# Altium PCB board.PcbDoc
Units mil, origin at the board's own origin, x right, y up, seen from the top; angles counter-clockwise.
Board outline 1692.91 x 787.4 mil, 2 copper layers (Top Layer, Bottom Layer); 68 components, 72 nets, 311 pads, 4 vias.
Unrouted connection lines stored in the file: 219.
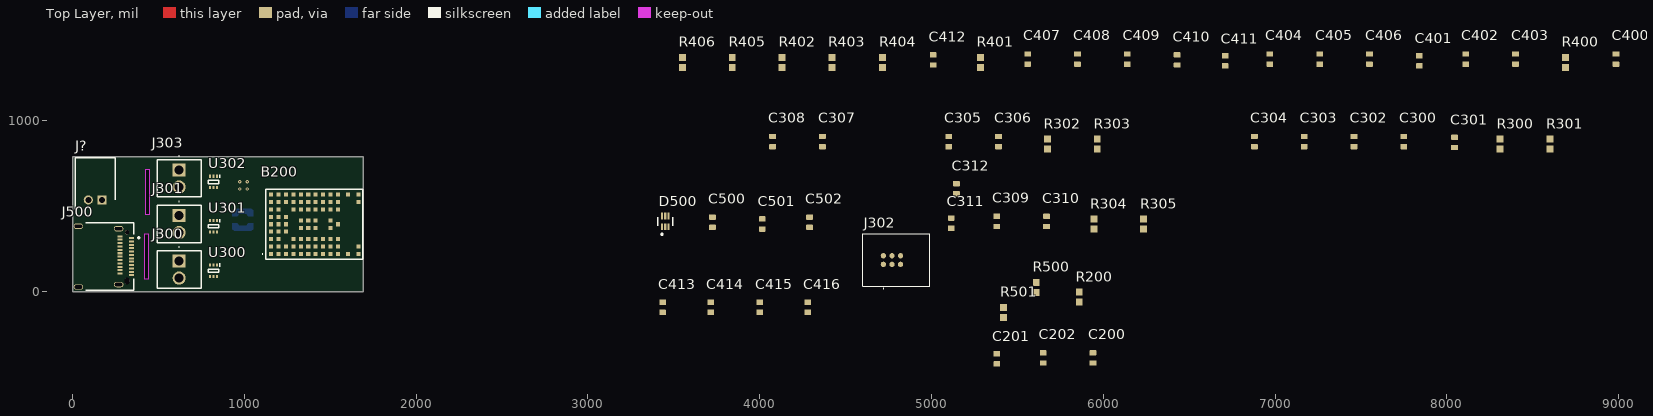
[diagram p0: Top Layer view]
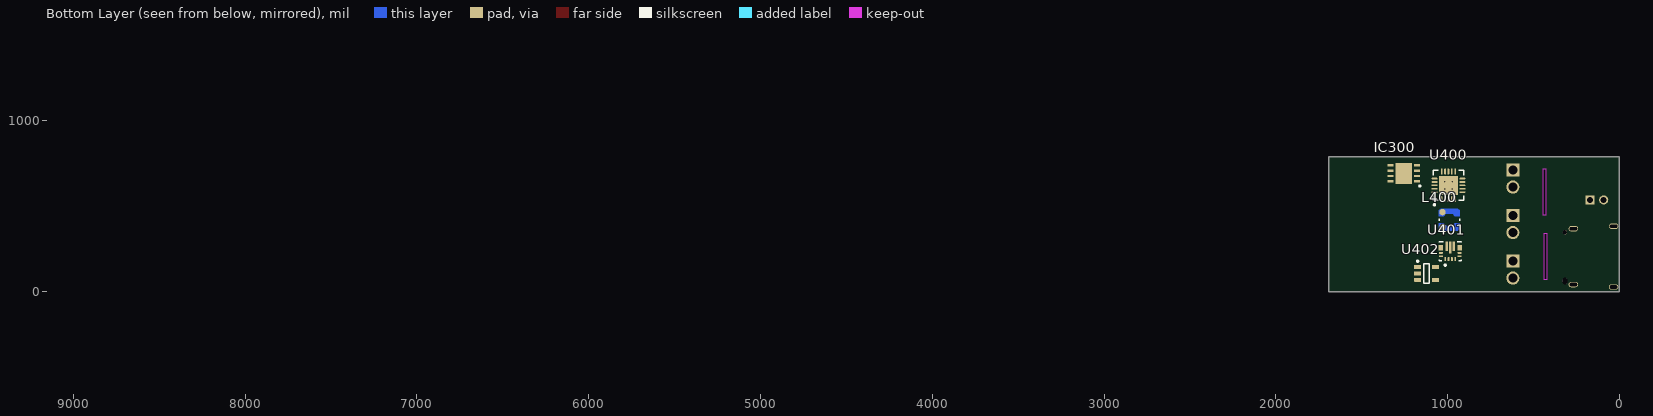
[diagram p1: Bottom Layer view, seen from below]

## Layer stack, top to bottom
Top Solder: solder mask 0.4, Solder Resist, Dk 3.5
Top Layer: signal copper 1.4
Dielectric 1: dielectric 12.6, FR-4, Dk 4.8
Bottom Layer: signal copper 1.4
Bottom Solder: solder mask 0.4, Solder Resist, Dk 3.5

## Board outline
0,0 0,787.4 1692.91,787.4 1692.91,0
cut-out: 420,337.5 440,337.5 440,72.5 420,72.5
cut-out: 425,715 445,715 445,450 425,450

## Design rules (kind name [scope] priority, off if disabled: settings)
Clearance [All] p1: gap=10 ignorepadtopadclearanceinfootprint=FALSE
DiffPairsRouting [All] p1: maxlimit=10 minlimit=10 mostfreqgap=10 toplayer_minwidth=15 toplayer_maxwidth=15 toplayer_prefwidth=15 bottomlayer_minwidth=15 bottomlayer_maxwidth=15 bottomlayer_prefwidth=15 maxuncoupledlength=500
PolygonConnect [All] p1: connectstyle=Relief reliefconductorwidth=10 reliefentries=4 polygonreliefangle="90 Angle" airgapwidth=10
RoutingVias [All] p1: holewidth=28 width=50 viastyle="Through Hole" minholewidth=28 minwidth=50 maxholewidth=28 maxwidth=50
SolderMaskExpansion [All] p1: expansion=4 istentingtop=FALSE
SupplyNets "Schematic Supply Nets_4" [InNet('V-BAT')] p1: voltage=0.000
SupplyNets "Schematic Supply Nets_3" [InNet('MCU_VBUS')] p2: voltage=0.000
SupplyNets "Schematic Supply Nets_2" [InNet('MCU_VDD')] p3: voltage=0.000
SupplyNets "Schematic Supply Nets_1" [InNet('MCU_GND')] p4: voltage=0.000
SupplyNets "Schematic Supply Nets" [InNet('5V0')] p5: voltage=0.000
Width [All] p1: maxlimit=10 minlimit=10 preferedwidth=10
29 further rules are at their usual default settings.

## Classes and differential pairs
component class U_USB: C500 C501 C502 D500 J500 R500 R501
component class U_Power: C400 C401 C402 C403 C404 C405 C406 C407 C408 C409 C410 C411 C412 C413 C414 C415 C416 J? L400 R400 R401 R402 R403 R404 R405 R406 U400 U401 U402
component class U_Peripherals: C300 C301 C302 C303 C304 C305 C306 C307 C308 C309 C310 C311 C312 IC300 J300 J301 J302 J303 R300 R301 R302 R303 R304 R305 U300 U301 U302
component class U_MCU_nRF5340: B200 C200 C201 C202 R200
differential pair USB_D: +USB_D_P -USB_D_N

## Components (designator, comment, footprint, x,y, rotation, side; value= is the part's Value field where it differs from the comment)
B200 "NORA-B126-00B" NORAB12600B 1407.13,393.35 r0 top
C200 "10uF" CAP_0603 5940,-385 r90 top
C201 "100nF" CAP_0603 5380,-390 r90 top
C202 "10uF" CAP_0603 5650,-385 r90 top
C300 "10uF" CAP_0603 7750,875 r90 top value=10µF
C301 "100nF" CAP_0603 8045,870 r90 top
C302 "100nF" CAP_0603 7460,875 r90 top
C303 "150pf" CAP_0603 7170,875 r90 top value=10µF
C304 "150pf" CAP_0603 6880,875 r90 top value=10µF
C305 "10uF" CAP_0603 5100,875 r90 top value=10µF
C306 "100nF" CAP_0603 5390,875 r90 top
C307 "150pf" CAP_0603 4365,875 r90 top value=10µF
C308 "150pf" CAP_0603 4075,875 r90 top value=10µF
C309 "10uF" CAP_0603 5380,410 r90 top value=10µF
C310 "100nF" CAP_0603 5670,410 r90 top
C311 "150pf" CAP_0603 5115,400 r90 top value=10µF
C312 "150pf" CAP_0603 5145,600.47 r90 top value=10µF
C400 "100nF" CAP_0603 8985,1355 r90 top
C401 "10uF" CAP_0603 7840,1345 r90 top value=10µF
C402 "100nF" CAP_0603 8110,1355 r90 top
C403 "22uF" CAP_0603 8400,1355 r90 top value=22µF
C404 "10uF" CAP_0603 6970,1355 r90 top value=10µF
C405 "100nF" CAP_0603 7260,1355 r90 top
C406 "22uF" CAP_0603 7550,1355 r90 top value=22µF
C407 "10uF" CAP_0603 5560,1355 r90 top value=10µF
C408 "10uF" CAP_0603 5850,1355 r90 top value=10µF
C409 "100nF" CAP_0603 6140,1355 r90 top
C410 "22uF" CAP_0603 6430,1350 r90 top value=22µF
C411 "22uF" CAP_0603 6710,1345 r90 top value=22µF
C412 "10uF" CAP_0603 5010,1350 r90 top value=10µF
C413 "100nF" CAP_0603 3435,-90 r90 top
C414 "22uF" CAP_0603 3715,-90 r90 top value=22µF
C415 "100nF" CAP_0603 4000,-90 r90 top
C416 "22uF" CAP_0603 4280,-90 r90 top value=22µF
C500 "10uF" CAP_0603 3725,405 r90 top
C501 "100nF" CAP_0603 4015,395 r90 top
C502 "100nF" CAP_0603 4290,405 r90 top
D500 "DSILC6-4P6" FP-SOT-666-MFG 3450,410 r90 top value=1.5pF
IC300 "MX25R6435FZAIL0-TR" SON80P400X400X60-9N 1255,690 r0 bottom
J300 "691210910002" 691210910002 620,180 r270 top
J301 "691210910002" 691210910002 620,445 r270 top
J302 "TC2030-IDC-NL" TC2030IDC 4757.52,185 r0 top
J303 "691210910002" 691210910002 620,710 r270 top
J500 "12401832E402A" FP-12401832E402A-MFG 145,205 r270 top
J? "S2B-PH-K-S_LF__SN_" SHDRRA2W50P0X200_1X2_590X760X480P 170,535 r0 top
L400 "LPS3015-223MRC" FP-LPS3015-MFG 990,420 r90 bottom
R200 "10K" RESC1607X60N 5860,-30 r90 top
R300 "41.7K" RESC1607X60N 8310,860 r90 top
R301 "41.7K" RESC1607X60N 8600,860 r90 top
R302 "41.7K" RESC1607X60N 5675,860 r90 top
R303 "41.7K" RESC1607X60N 5965,860 r90 top
R304 "41.7K" RESC1607X60N 5945,395 r90 top
R305 "41.7K" RESC1607X60N 6235,395 r90 top
R400 "220K" RESC1607X60N 8690,1335 r90 top
R401 "41.7K" RESC1607X60N 5285,1335 r90 top
R402 "10K" RESC1607X60N 4130,1335 r90 top
R403 "10K" RESC1607X60N 4420,1335 r90 top
R404 "10K" RESC1607X60N 4715,1335 r90 top
R405 "10K" RESC1607X60N 3840,1335 r90 top
R406 "100K" RESC1607X60N 3550,1335 r90 top
R500 "5.1K" RESC1607X60N 5610,26.06 r90 top
R501 "5.1K" RESC1607X60N 5420,-120 r90 top
U300 "DRV8212DRLR" SOTFL50P160X60-6N 820,122.99 r270 top
U301 "DRV8212DRLR" SOTFL50P160X60-6N 820,381.5 r270 top
U302 "DRV8212DRLR" SOTFL50P160X60-6N 820,640 r270 top
U400 "MCP73871-1CAI/ML" QFN-ML20_M 995,620 r90 bottom
U401 "TPS63070RNMR" FP-RNM0015A-MFG 984.53,235.28 r90 bottom
U402 "TLV78533PDBVR" SOT-23-5 1122.17,107.4 r180 bottom

## Footprints (in the part's own frame and the unit in brackets; to place one, negate y for a bottom-side part, rotate by r counter-clockwise, add the part's x,y. Pads: shape width x height; smd on the part's side, far side on the other; paste and mask are expansions set on the pad)
691210910002 [mm]
  rect 1.95x1.95 hole 1.3: 1(0,0)
  round 1.95 hole 1.3: 2(2.54,0)
  silkscreen extent -2.1,-3.25 4.01,3.25, body extent -1.47,-3.38 4.01,3.12, height 8.51
CAP_0603 [mm]
  rrect25% 0.8x1 smd: 1(-0.75,0) 2(0.75,0)
  body extent -0.8,-0.4 0.8,0.4, height 0.51
FP-12401832E402A-MFG [mm]
  rrect100% 0.8x1.4 hole 1.1 slot 0.5 at 0 deg paste-2539.97 mask+0: 1(-4.13,3.115) 2(4.13,3.115) 3(-4.49,-2.835) 4(4.49,-2.835)
  rect 0.3x0.7 smd paste+0 mask+0: A1(-2.75,5.025) A2(-2.25,5.025) A3(-1.75,5.025) A4(-1.25,5.025) A5(-0.75,5.025) A6(-0.25,5.025) A7(0.25,5.025) A8(0.75,5.025) A9(1.25,5.025) A10(1.75,5.025) A11(2.25,5.025) A12(2.75,5.025) B1(2.5,3.325) B2(2,3.325) B3(1.5,3.325) B4(1,3.325) B5(0.5,3.325) B6(0,3.325) B7(-0.5,3.325) B8(-1,3.325) B9(-1.5,3.325) B10(-2,3.325) B11(-2.5,3.325) B12(-3,3.325)
  round 0.65 hole 0.65 unplated paste-2539.97 mask+0: ""(-3.6,4.365)
  rrect100% 0.95x0.65 hole 0.65 slot 0.95 at 0 deg unplated paste-2539.97 mask+0: ""(3.6,4.365)
  silkscreen extent -5.01,-1.76 4.99,6.22, body extent -4.99,-5.45 4.99,5.48, height 0.25
FP-LPS3015-MFG [mil]
  round 36.89 smd paste+0 mask+0: 1(-43.92,39.54) 2(43.92,39.54)
  Top Layer region: 20.08,-60.04 54.92,-60.04 64.96,-50 64.96,50 54.92,60.04 20.08,60.04 20.08,32.48 35.04,20.08 35.04,-20.08 20.08,-32.48 20.08,-60.04
  Top Layer region: -20.08,-60.04 -54.92,-60.04 -64.96,-50 -64.96,50 -54.92,60.04 -20.08,60.04 -20.08,32.48 -35.04,20.08 -35.04,-20.08 -20.08,-32.48 -20.08,-60.04
  silkscreen extent -5,-60 5,60, body extent -58,-58 58,58, height 59
FP-RNM0015A-MFG [mm]
  rrect40% 0.6x0.25 smd paste+0 mask-1000: 1(-1.15,0.75) 2(-1.15,0.25) 3(-1.15,-0.25) 4(-1.15,-0.75)
  rrect40% 0.25x0.6 smd paste+0 mask-1000: 5(-0.725,-1.4) 6(-0.225,-1.4) 14(-0.225,1.4) 15(-0.725,1.4)
  rrect29% 0.85x0.7 smd paste-1000 mask-1000: 7-8(0.525,-1.4) 12-13(0.525,1.4)
  rrect57% 1.45x0.35 smd paste-1000 mask-1000: 9(0.775,-0.5) 11(0.775,0.5)
  rrect57% 1.8x0.35 smd paste-1000 mask-1000: 10(0.6,0)
  silkscreen extent -2.15,-1.65 1.4,1.65, body extent -1.25,-1.5 1.25,1.5, height 1
FP-SOT-666-MFG [mm]
  rect 0.99x0.3 smd paste+0 mask+0: 1(-0.805,0.5) 2(-0.805,0) 3(-0.805,-0.5) 4(0.805,-0.5) 5(0.805,0) 6(0.805,0.5)
  silkscreen extent -2.02,-1.1 0.65,1.1, body extent -1.4,-0.95 1.4,0.95, height 0.25
NORAB12600B [mm]
  rect 0.6x0.6 smd: A1(-6.4,-4.4) A2(-6.4,-3.3) A3(-6.4,-2.2) A4(-6.4,-1.1) A5(-6.4,0) A6(-6.4,1.1) A7(-6.4,2.2) A8(-6.4,3.3) A9(-6.4,4.4) B1(-5.3,-4.4) B2(-5.3,-3.3) B3(-5.3,-2.2) B4(-5.3,-1.1) B5(-5.3,0) B6(-5.3,1.1) B7(-5.3,2.2) B8(-5.3,3.3) B9(-5.3,4.4) C1(-4.2,-4.4) C2(-4.2,-3.3) C4(-4.2,-1.1) C5(-4.2,0) C6(-4.2,1.1) C8(-4.2,3.3) C9(-4.2,4.4) D1(-3.1,-4.4) D2(-3.1,-3.3) D3(-3.1,-2.2) D7(-3.1,2.2) D8(-3.1,3.3) D9(-3.1,4.4) E1(-2,-4.4) E2(-2,-3.3) E3(-2,-2.2) E4(-2,-0.55) E5(-2,0.55) E7(-2,2.2) E8(-2,3.3) E9(-2,4.4) F1(-0.9,-4.4) F2(-0.9,-3.3) F3(-0.9,-2.2) F4(-0.9,-0.55) F5(-0.9,0.55) F7(-0.9,2.2) F8(-0.9,3.3) F9(-0.9,4.4) G1(0.2,-4.4) G2(0.2,-3.3) G3(0.2,-2.2) G4(0.2,-0.55) G5(0.2,0.55) G7(0.2,2.2) G8(0.2,3.3) G9(0.2,4.4) H1(1.3,-4.4) H2(1.3,-3.3) H3(1.3,-2.2) H7(1.3,2.2) H8(1.3,3.3) H9(1.3,4.4) J1(2.4,-4.4) J2(2.4,-3.3) J3(2.4,-2.2) J4(2.4,-0.55) J5(2.4,0.55) J7(2.4,2.2) J8(2.4,3.3) J9(2.4,4.4) K1(3.5,-4.4) K2(3.5,-3.3) K3(3.5,-2.2) K5(3.5,0) K7(3.5,2.2) K8(3.5,3.3) K9(3.5,4.4) L1(5,-4.4) L9(5,4.4) M1(6.5,-4.4) M2(6.5,-3.3) M8(6.5,3.3) M9(6.5,4.4)
  silkscreen extent -7.7,-5.2 7.15,5.2, body extent -7.11,-5.19 7.19,5.21, height 1.36
QFN-ML20_M [mm] "QFN, 20-Leads, Body 4x4mm, Pitch 0.5mm, Thermal Pad 2.8x2.8mm, IPC Low Density"
  oval 0.9x0.25 smd: 1(-2.05,1) 2(-2.05,0.5) 3(-2.05,0) 4(-2.05,-0.5) 5(-2.05,-1) 11(2.05,-1) 12(2.05,-0.5) 13(2.05,0) 14(2.05,0.5) 15(2.05,1)
  oval 0.25x0.9 smd: 6(-1,-2.05) 7(-0.5,-2.05) 8(0,-2.05) 9(0.5,-2.05) 10(1,-2.05) 16(1,2.05) 17(0.5,2.05) 18(0,2.05) 19(-0.5,2.05) 20(-1,2.05)
  rect 2.8x2.8 smd: 21(0,0)
  silkscreen extent -3,-2.22 2.23,2.23, body extent -2.07,-2.07 2.08,2.08, height 1
RESC1607X60N [mm]
  rect 1.04x1.02 smd: 1(-0.735,0) 2(0.735,0)
  body extent -0.8,-0.4 0.8,0.4, height 0.55
SHDRRA2W50P0X200_1X2_590X760X480P [mm]
  rect 1.35x1.35 / inner round 1.35 / far side rect 1.35x1.35 hole 0.9: 1(0,0)
  round 1.35 hole 0.9: 2(-2,0)
  silkscreen extent -3.95,-1.35 1.95,6.25, body extent -3.95,-1.35 1.95,6.25, height 4.8
SON80P400X400X60-9N [mm]
  rect 0.85x0.35 smd: 1(-1.95,1.2) 2(-1.95,0.4) 3(-1.95,-0.4) 4(-1.95,-1.2) 5(1.95,-1.2) 6(1.95,-0.4) 7(1.95,0.4) 8(1.95,1.2)
  rect 2.4x3.1 smd: 9(0,0)
  silkscreen extent -2.5,1.75 -2.25,2, body extent -2.05,-2 2.05,2, height 0.6
SOT-23-5 [mm] "SOT23, 5-Leads, Body 2,90x2,80mm, Pitch 0,95mm, IPC Medium Density"
  rrect25% 1.05x0.6 smd: 1(-1.325,0.95) 2(-1.325,0) 3(-1.325,-0.95) 4(1.325,-0.95) 5(1.325,0.95)
  silkscreen extent -1.45,-1.45 0.4,1.92, body extent -1.4,-1.45 1.4,1.45, height 1.45
SOTFL50P160X60-6N [mm]
  rect 0.475x0.3 smd: 1(-0.838,0.5) 2(-0.838,0) 3(-0.838,-0.5) 4(0.838,-0.5) 5(0.838,0) 6(0.838,0.5)
  silkscreen extent -1.07,-0.8 0.25,0.9, body extent -0.8,-0.8 0.8,0.8, height 0.6
TC2030IDC [mil]
  round 30.83 smd: 1(-37.52,-25) 2(-37.52,25) 3(12.48,-25) 4(12.48,25) 5(62.52,-25) 6(62.52,25)
  round 48.25 hole 96.5 unplated: 7(-87.52,-100) 9(-87.52,100) 10(37.48,-100) 11(37.48,100)
  round 21 hole 42.01 unplated: 8(-87.52,0) 12(112.48,-40) 13(112.48,40)
  silkscreen extent -157,-167 232,154

## Part data
B200: "Stand-alone dual-core Bluetooth 5.2 Low Energy and IEEE 802.15.4 module", Manufacturer_Name=u-blox, Mouser Part Number=377-NORA-B126-00B, Datasheet Link=https://content.u-blox.com/sites/default/files/NORA-B1_DataSheet_UBX-20027119.pdf, Geometry.Height=1.8mm, Manufacturer_Part_Number=NORA-B126-00B, Mouser Price/Stock=https://www.mouser.co.uk/ProductDetail/u-blox/NORA-B126-00B?qs=MyNHzdoqoQLrkbXxJ8%252ByHg%3D%3D
C200 C201 C202 C301 C302 C306 C310 C500 C501 C502: library part CAP_0603, "Capacitor SMD 0603"
C300 C303 C304 C305 C307 C308 C309 C311 C312 C401 C404 C407 C408 C412: library part CAP_0603, "Ceramic Capacitor, Multilayer, Ceramic, 4V, 20% +Tol, 20% -Tol, X6S, 22% TC, 10uF, Surface Mount, 1608M/0603", Case/Package=0603, Dielectric Material=Ceramic, Max Operating Temperature=105°C, Min Operating Temperature=-55°C, Supplier Part Number=81-GXT188C80G106ME3D, Tolerance=20%, Voltage Rating=4V, Category="Ceramic Capacitors", ComponentLink1Description=http://sigma.octopart.com:80/reach_statement/Murata-company-16.pdf?src-supplier=Compliance+Statements, ComponentLink1URL=http://sigma.octopart.com:80/reach_statement/Murata-company-16.pdf?src-supplier=Compliance+Statements, Height=800µm, Length=1.6mm, Lifecycle Status=Production, Material=Ceramic, Mounting Technology="Surface Mount", Number of Terminals=2, Pricing="1=0.31, 10=0.202, 50=0.202, 100=0.115, 1000=0.082, 10000=0.063 (USD)", REACH SVHC=Yes, RoHS=Compliant, Stock=3027, Supplier=Mouser, Voltage Rating (DC)=4V, Width=800µm
C400 C402 C405 C409 C413 C415: library part CAP_0603, "Multilayer Ceramic Capacitors MLCC, 0.1 uF, 10 %, 0603, 50V, X7R, TR", Dielectric Material=Ceramic, Max Operating Temperature=125°C, Min Operating Temperature=-55°C, Supplier Part Number=2183445, Voltage Rating (DC)=50V, Category="Ceramic Capacitors", ComponentLink1Description=https://datasheet.octopart.com:443/MAJCU168BB7104KTEA01-Taiyo-Yuden-datasheet-182113548.pdf?src-supplier=IHS, ComponentLink1URL=https://datasheet.octopart.com:443/MAJCU168BB7104KTEA01-Taiyo-Yuden-datasheet-182113548.pdf?src-supplier=IHS, Lifecycle Status=Production, Mounting Technology="Surface Mount", Number of Terminals=2, Pricing="3000=0.0115, 9000=0.0112, 30000=0.0109, 60000=0.0108, 120000=0.0105 (USD)", REACH SVHC=Yes, RoHS=Compliant, Stock=3000, Supplier="Future Electronics"
C403 C406 C410 C411 C414 C416: library part CAP_0603, "Ceramic Capacitor, Multilayer, Ceramic, 6.3V, 20% +Tol, 20% -Tol, X6S, 22uF, Surface Mount, 1608M/0603", Case/Package=0603, Dielectric Material=Ceramic, Max Operating Temperature=105°C, Min Operating Temperature=-55°C, Supplier Part Number=81-GRM188C80J226ME1D, Tolerance=20%, Voltage Rating=6.3V, Category="Ceramic Capacitors", ComponentLink1Description=https://datasheet.octopart.com:443/GRM188C80J226ME01D-Murata-datasheet-165579666.pdf?src-supplier=TME, ComponentLink1URL=https://datasheet.octopart.com:443/GRM188C80J226ME01D-Murata-datasheet-165579666.pdf?src-supplier=TME, ComponentLink2Description=https://datasheet.octopart.com/GRM188C80J226ME01D-Murata-datasheet-12515295.pdf, ComponentLink2URL=https://datasheet.octopart.com/GRM188C80J226ME01D-Murata-datasheet-12515295.pdf, ComponentLink3Description=https://datasheet.octopart.com/GRM188C80J226ME01D-Murata-datasheet-12510076.pdf, ComponentLink3URL=https://datasheet.octopart.com/GRM188C80J226ME01D-Murata-datasheet-12510076.pdf, ComponentLink4Description=https://datasheet.octopart.com/GRM188C80J226ME01D-Murata-datasheet-11978611.pdf, ComponentLink4URL=https://datasheet.octopart.com/GRM188C80J226ME01D-Murata-datasheet-11978611.pdf, ComponentLink5Description=https://datasheet.octopart.com/GRM188C80J226ME01D-Murata-datasheet-10025737.pdf, ComponentLink5URL=https://datasheet.octopart.com/GRM188C80J226ME01D-Murata-datasheet-10025737.pdf, ComponentLink6Description=https://datasheet.octopart.com/GRM188C80J226ME01D-Murata-datasheet-8819587.pdf, ComponentLink6URL=https://datasheet.octopart.com/GRM188C80J226ME01D-Murata-datasheet-8819587.pdf, ComponentLink7Description=http://sigma.octopart.com:80/reach_statement/Murata-company-16.pdf?src-supplier=Compliance+Statements, ComponentLink7URL=http://sigma.octopart.com:80/reach_statement/Murata-company-16.pdf?src-supplier=Compliance+Statements, Height=800µm, Length=1.6mm, Lifecycle Status=Production, Material=Ceramic, Mounting Technology="Surface Mount", Number of Terminals=2, Pricing="1=0.3, 1=0.258, 10=0.195, 10=0.168, 50=0.195, 100=0.112, 100=0.096, 500=0.077, 1000=0.082, 1000=0.071, 2000=0.065, 4000=0.057, 8000=0.053, 10000=0.062, 24000=0.052 (USD)", REACH SVHC=Yes, RoHS=Compliant, Stock=5675, Supplier=Mouser, Thickness=800µm, Voltage Rating (DC)=6.3V, Width=800µm
D500: library part CMP-12225-000033-1, "TVS DIODE 5V SOT666", Breakdown Voltage=6V, Capacitance=1.5pF, Manufacturer=STMicroelectronics, Max Junction Temp=+125°C, Package=SOT-666, Peak Pulse Current=5A, Peak Pulse Power=90W, Reverse Standoff Voltage=5V, Temperature="to +125°C", Automotive=No, Category=Diode, ComponentLink2Description=Datasheet, ComponentLink2URL=https://www.st.com/resource/en/datasheet/dsilc6-4xx.pdf, Device Class L1="Circuit Protection", Device Class L2="TVS Diodes", Device Class L3=unset, Digikey Description="TVS DIODE 5V SOT666", Direction=Unidirectional, Height=0.6mm, Lead Free=Yes, Manufacturer Part Number=DSILC6-4P6, Mouser Description="DSILC6 Series 4 Channel 6 V Uni-Directional Diode Array - SOT-666", Number Of Channels=4, Octopart=https://octopart.com/dsilc6-4p6-stmicroelectronics-660265, RoHS=TRUE, Temperature Range High=+125°C
IC300: "Integrated Circuit", Manufacturer_Name=Macronix, Mouser Part Number=95-25R6435FZAIL0TR, Datasheet Link=https://www.mouser.com/datasheet/2/819/MX25R6435F_2c_Wide_Range_2c_64Mb_2c_v1_6-3370962.pdf, Height=0.6mm, Manufacturer_Part_Number=MX25R6435FZAIL0-TR, Mouser Price/Stock=https://www.mouser.co.uk/ProductDetail/Macronix/MX25R6435FZAIL0-TR?qs=mELouGlnn3cK%252BXKdc9RzBg%3D%3D
J300 J301 J303: "WR-TBL Terminal block - Rising Cage - THT Serie 2109 - 2,54mm pitch - Monoblock THT - Green - Horizontal cable entry Rising Cage Clamp 8.5mm height - 02p", Manufacturer_Name="Wurth Elektronik", Mouser Part Number=710-691210910002, Datasheet Link=https://www.we-online.com/catalog/datasheet/691210910002.pdf, Geometry.Height=8.8mm, Manufacturer_Part_Number=691210910002, Mouser Price/Stock=https://www.mouser.co.uk/ProductDetail/Wurth-Elektronik/691210910002?qs=sPbYRqrBIVlpmUgpxfjjUA%3D%3D
J302: "CABLE ADAPTER 6 POS", Package=None, Availability=Unavailable, MP=TC2030-IDC-NL, Price=None
J500: library part CMP-02355-000004-1, "CONN RCP USB3.1 TYPEC 24P SMD RA"
J?: "PH-2.0mm Header side entry 2 way JST PH Series, Series Number S2B, 2mm Pitch 2 Way 1 Row Right Angle PCB Header, Through Hole Termination, 2A", Manufacturer_Name="JST (JAPAN SOLDERLESS TERMINALS)", Manufacturer_Part_Number=S2B-PH-K-S(LF)(SN), Mouser Part Number=306-S2BPHKSLFSNPP, Geometry.Height=4.8mm, Mouser Price/Stock=https://www.mouser.co.uk/ProductDetail/JST-Commercial/S2B-PH-K-SLFSN?qs=cdbOS8ANM9A5Ie4gXeMjTA%3D%3D
L400: "Inductor", Manufacturer_Name=COILCRAFT, Mouser Part Number=994-LPS3015-223MRC, Datasheet Link=https://www.digikey.com/en/products/detail/coilcraft/LPS3015-223MRC/12714657, Height=1.5mm, Manufacturer_Part_Number=LPS3015-223MRC, Mouser Price/Stock=https://www.mouser.co.uk/ProductDetail/Coilcraft/LPS3015-223MRC?qs=QQJxVsr8EGYLL9xIR9QoZA%3D%3D
R200 R500 R501: library part RC0603JR0710KL, "10 kOhms Â±5% 0.1W, 1/10W Chip Resistor 0603 (1608 Metric) Moisture Resistant Thick Film", Package="0603 Yageo", Check_prices=https://www.snapeda.com/parts/RC0603JR0710KL/Yageo/view-part/?ref=eda, MF=Yageo, MP=RC0603JR0710KL, SnapEDA_Link=https://www.snapeda.com/parts/RC0603JR0710KL/Yageo/view-part/?ref=snap
R300 R301 R302 R303 R304 R305 R401: library part RC0603JR0710KL, "Res Thin Film 0402 41.7K Ohm 0.1% 1/16W 25ppm/C Molded SMD SMD Paper T/R", Case/Package=0402, Manufacturer=Vishay, Manufacturer Part Number=TNPW040241K7BEED, Max Operating Temperature=125°C, Max Power Dissipation=63mW, Min Operating Temperature=-55°C, Package="0603 Yageo", Supplier Part Number=3975618RL, Temperature Coefficient=25ppm/°C, Tolerance=0.1%, Working Voltage=50V, Category="Chip SMD Resistors", Check_prices=https://www.snapeda.com/parts/RC0603JR0710KL/Yageo/view-part/?ref=eda, China RoHS=Compliant, ComponentLink1Description=https://datasheet.octopart.com:443/TNPW040241K7BEED-Vishay-datasheet-182188515.pdf?src-supplier=IHS, ComponentLink1URL=https://datasheet.octopart.com:443/TNPW040241K7BEED-Vishay-datasheet-182188515.pdf?src-supplier=IHS, ComponentLink2Description=https://datasheet.octopart.com:443/TNPW040241K7BEED-Vishay-Dale-datasheet-182026744.pdf?src-supplier=IHS, ComponentLink2URL=https://datasheet.octopart.com:443/TNPW040241K7BEED-Vishay-Dale-datasheet-182026744.pdf?src-supplier=IHS, ComponentLink3Description=https://datasheet.octopart.com/TNPW040241K7BEED-Vishay-datasheet-13498837.pdf, ComponentLink3URL=https://datasheet.octopart.com/TNPW040241K7BEED-Vishay-datasheet-13498837.pdf, ComponentLink4Description=https://datasheet.octopart.com/TNPW040241K7BEED-Vishay-datasheet-13414878.pdf, ComponentLink4URL=https://datasheet.octopart.com/TNPW040241K7BEED-Vishay-datasheet-13414878.pdf, ComponentLink5Description=https://datasheet.octopart.com/TNPW040241K7BEED-Vishay-datasheet-13295955.pdf, ComponentLink5URL=https://datasheet.octopart.com/TNPW040241K7BEED-Vishay-datasheet-13295955.pdf, ComponentLink6Description=https://datasheet.octopart.com/TNPW040241K7BEED-Vishay-datasheet-13196373.pdf, ComponentLink6URL=https://datasheet.octopart.com/TNPW040241K7BEED-Vishay-datasheet-13196373.pdf, ComponentLink7Description=https://datasheet.octopart.com/TNPW040241K7BEED-Vishay-datasheet-13143890.pdf, ComponentLink7URL=https://datasheet.octopart.com/TNPW040241K7BEED-Vishay-datasheet-13143890.pdf, ComponentLink8Description=https://datasheet.octopart.com/TNPW040241K7BEED-Vishay-datasheet-13081780.pdf, ComponentLink8URL=https://datasheet.octopart.com/TNPW040241K7BEED-Vishay-datasheet-13081780.pdf, ComponentLink9Description=https://datasheet.octopart.com/TNPW040241K7BEED-Vishay-datasheet-13052401.pdf, ComponentLink9URL=https://datasheet.octopart.com/TNPW040241K7BEED-Vishay-datasheet-13052401.pdf, ComponentLink10Description=https://datasheet.octopart.com/TNPW040241K7BEED-Vishay-datasheet-13034137.pdf, ComponentLink10URL=https://datasheet.octopart.com/TNPW040241K7BEED-Vishay-datasheet-13034137.pdf, ComponentLink11Description=https://datasheet.octopart.com/TNPW040241K7BEED-Vishay-datasheet-12585086.pdf, ComponentLink11URL=https://datasheet.octopart.com/TNPW040241K7BEED-Vishay-datasheet-12585086.pdf, ComponentLink12Description=https://datasheet.octopart.com/TNPW040241K7BEED-Vishay-datasheet-12543131.pdf, ComponentLink12URL=https://datasheet.octopart.com/TNPW040241K7BEED-Vishay-datasheet-12543131.pdf, ComponentLink13Description=https://datasheet.octopart.com/TNPW040241K7BEED-Vishay-datasheet-12532511.pdf, ComponentLink13URL=https://datasheet.octopart.com/TNPW040241K7BEED-Vishay-datasheet-12532511.pdf, ComponentLink14Description=https://datasheet.octopart.com/TNPW040241K7BEED-Vishay-datasheet-12519971.pdf, ComponentLink14URL=https://datasheet.octopart.com/TNPW040241K7BEED-Vishay-datasheet-12519971.pdf, ComponentLink15Description=https://datasheet.octopart.com/TNPW040241K7BEED-Vishay-datasheet-12509767.pdf, ComponentLink15URL=https://datasheet.octopart.com/TNPW040241K7BEED-Vishay-datasheet-12509767.pdf, ComponentLink16Description=https://datasheet.octopart.com/TNPW040241K7BEED-Vishay-datasheet-12365287.pdf, ComponentLink16URL=https://datasheet.octopart.com/TNPW040241K7BEED-Vishay-datasheet-12365287.pdf, ComponentLink17Description=https://datasheet.octopart.com/TNPW040241K7BEED-Vishay-datasheet-10854096.pdf, ComponentLink17URL=https://datasheet.octopart.com/TNPW040241K7BEED-Vishay-datasheet-10854096.pdf, ComponentLink18Description=https://datasheet.octopart.com/TNPW040241K7BEED-Vishay-datasheet-10678752.pdf, ComponentLink18URL=https://datasheet.octopart.com/TNPW040241K7BEED-Vishay-datasheet-10678752.pdf, ComponentLink19Description=https://datasheet.octopart.com/TNPW040241K7BEED-Vishay-datasheet-10283461.pdf, ComponentLink19URL=https://datasheet.octopart.com/TNPW040241K7BEED-Vishay-datasheet-10283461.pdf, ComponentLink20Description=https://datasheet.octopart.com/TNPW040241K7BEED-Vishay-datasheet-10185418.pdf, ComponentLink20URL=https://datasheet.octopart.com/TNPW040241K7BEED-Vishay-datasheet-10185418.pdf, ComponentLink21Description=https://datasheet.octopart.com/TNPW040241K7BEED-Vishay-datasheet-10055244.pdf, ComponentLink21URL=https://datasheet.octopart.com/TNPW040241K7BEED-Vishay-datasheet-10055244.pdf, ComponentLink22Description=http://sigma.octopart.com:80/rohs_statement/Vishay-company-15.pdf?src-supplier=Compliance+Statements, ComponentLink22URL=http://sigma.octopart.com:80/rohs_statement/Vishay-company-15.pdf?src-supplier=Compliance+Statements, Composition="Thin Film", Contact Plating=Tin, Features="Anti-Sulfur, Automotive AEC-Q200, Moisture Resistant", Height=350µm, Length=990.6µm, Lifecycle Status=Production, MF=Yageo, Mounting Technology="Surface Mount", MP=RC0603JR0710KL, Number of Terminals=2, Number of Terminations=2, Power Dissipation=63mW, Power Rating=63mW, Pricing="100=0.15, 500=0.128, 2500=0.127, 5000=0.118, 10000=0.0988 (EUR)", REACH SVHC=Yes, RoHS=Compliant, SnapEDA_Link=https://www.snapeda.com/parts/RC0603JR0710KL/Yageo/view-part/?ref=snap, Stock=4910, Supplier=Farnell, Width=500µm
R400: library part RC0603JR0710KL, "Res Thick Film 0603 220K Ohm 1% 1/10W ±100ppm/°C Molded SMD SMD Paper Tape on Plastic Reel", Case Code (Imperial)=0603, Case Code (Metric)=1608, Manufacturer=Bourns, Manufacturer Part Number=CR0603-FX-2203ELF, Max Operating Temperature=155°C, Max Power Dissipation=100mW, Min Operating Temperature=-55°C, Package="0603 Yageo", Supplier Part Number=458582, Temperature Coefficient=100ppm/°C, Tolerance=1%, Voltage Rating=75V, Voltage Rating (DC)=50V, Case/Package=0603, Category="Chip SMD Resistors", Check_prices=https://www.snapeda.com/parts/RC0603JR0710KL/Yageo/view-part/?ref=eda, China RoHS=Non-Compliant, ComponentLink1Description=https://datasheet.octopart.com:443/CR0603-FX-2203ELF-Bourns-datasheet-159578630.pdf?src-supplier=ODG+(Origin+Data+Global), ComponentLink1URL=https://datasheet.octopart.com:443/CR0603-FX-2203ELF-Bourns-datasheet-159578630.pdf?src-supplier=ODG+(Origin+Data+Global), ComponentLink2Description=https://datasheet.octopart.com:443/CR0603-FX-2203ELF-Bourns-datasheet-181955239.pdf?src-supplier=IHS, ComponentLink2URL=https://datasheet.octopart.com:443/CR0603-FX-2203ELF-Bourns-datasheet-181955239.pdf?src-supplier=IHS, ComponentLink3Description=https://datasheet.octopart.com:443/CR0603-FX-2203ELF-Bourns-datasheet-68301634.pdf?src-supplier=Burklin+Elektronik, ComponentLink3URL=https://datasheet.octopart.com:443/CR0603-FX-2203ELF-Bourns-datasheet-68301634.pdf?src-supplier=Burklin+Elektronik, ComponentLink4Description=https://datasheet.octopart.com:443/CR0603-FX-2203ELF-Bourns-datasheet-49799764.pdf?src-supplier=Newark, ComponentLink4URL=https://datasheet.octopart.com:443/CR0603-FX-2203ELF-Bourns-datasheet-49799764.pdf?src-supplier=Newark, ComponentLink5Description=https://datasheet.octopart.com:443/CR0603-FX-2203ELF-Bourns-datasheet-154729663.pdf?src-supplier=Electro+Sonic, ComponentLink5URL=https://datasheet.octopart.com:443/CR0603-FX-2203ELF-Bourns-datasheet-154729663.pdf?src-supplier=Electro+Sonic, ComponentLink6Description=https://datasheet.octopart.com/CR0603-FX-2203ELF-Bourns-datasheet-5318152.pdf, ComponentLink6URL=https://datasheet.octopart.com/CR0603-FX-2203ELF-Bourns-datasheet-5318152.pdf, ComponentLink7Description=https://datasheet.octopart.com:443/CR0603-FX-2203ELF-Bourns-datasheet-137066215.pdf?src-supplier=X-ON, ComponentLink7URL=https://datasheet.octopart.com:443/CR0603-FX-2203ELF-Bourns-datasheet-137066215.pdf?src-supplier=X-ON, ComponentLink8Description=https://datasheet.octopart.com:443/CR0603-FX-2203ELF-Bourns-datasheet-140567134.pdf?src-supplier=Arrow.cn, ComponentLink8URL=https://datasheet.octopart.com:443/CR0603-FX-2203ELF-Bourns-datasheet-140567134.pdf?src-supplier=Arrow.cn, ComponentLink9Description=http://sigma.octopart.com:80/conflict_mineral_statement/Bourns-company-36.pdf?src-supplier=Compliance+Statements, ComponentLink9URL=http://sigma.octopart.com:80/conflict_mineral_statement/Bourns-company-36.pdf?src-supplier=Compliance+Statements, Composition="Thick Film", Contact Plating=Tin, Features="Moisture Resistant", Height=450µm, Length=1.6002mm, Lifecycle Status=Production, MF=Yageo, Mounting Technology="Surface Mount", MP=RC0603JR0710KL, Number of Terminals=2, Number of Terminations=2, Power Dissipation=100mW, Power Rating=100mW, Pricing="10=0.004 (EUR)", Radiation Hardening=No, REACH SVHC=Yes, RoHS=Compliant, Schedule B="8533210045, 8533210045|8533210045, 8533210045|8533210045|8533210045, 8533210045|8533210045|8533210045|8533210045", SnapEDA_Link=https://www.snapeda.com/parts/RC0603JR0710KL/Yageo/view-part/?ref=snap, Stock=14800, Supplier=RS, Termination=SMD/SMT, Width=800µm, Working Voltage=75V
R402 R403 R404 R405: library part RC0603JR0710KL, "10 kOhms ±5% 0.1W Chip Resistor 0603 Anti-Sulfur AEC-Q200 Thick Film", Case Code (Imperial)=0603, Case Code (Metric)=1608, Manufacturer=Vishay, Manufacturer Part Number=RCA060310K0JNEA, Max Operating Temperature=155°C, Max Power Dissipation=100mW, Min Operating Temperature=-55°C, Package="0603 Yageo", Temperature Coefficient=200ppm/°C, Tolerance=5%, Working Voltage=75V, Case/Package=0603, Category="Chip SMD Resistors", Check_prices=https://www.snapeda.com/parts/RC0603JR0710KL/Yageo/view-part/?ref=eda, China RoHS=Non-Compliant, ComponentLink1Description=https://datasheet.octopart.com:443/RCA060310K0JNEA-Vishay-datasheet-181963188.pdf?src-supplier=IHS, ComponentLink1URL=https://datasheet.octopart.com:443/RCA060310K0JNEA-Vishay-datasheet-181963188.pdf?src-supplier=IHS, ComponentLink2Description=https://datasheet.octopart.com:443/RCA060310K0JNEA-Vishay-datasheet-188933149.pdf?src-supplier=TME, ComponentLink2URL=https://datasheet.octopart.com:443/RCA060310K0JNEA-Vishay-datasheet-188933149.pdf?src-supplier=TME, ComponentLink3Description=https://datasheet.octopart.com:443/RCA060310K0JNEA-Vishay-datasheet-12588632.pdf?src-supplier=Future+Electronics, ComponentLink3URL=https://datasheet.octopart.com:443/RCA060310K0JNEA-Vishay-datasheet-12588632.pdf?src-supplier=Future+Electronics, ComponentLink4Description=https://datasheet.octopart.com:443/RCA060310K0JNEA-Vishay-datasheet-12542284.pdf?src-supplier=Future+Electronics, ComponentLink4URL=https://datasheet.octopart.com:443/RCA060310K0JNEA-Vishay-datasheet-12542284.pdf?src-supplier=Future+Electronics, ComponentLink5Description=https://datasheet.octopart.com:443/RCA060310K0JNEA-Vishay-datasheet-12535775.pdf?src-supplier=Future+Electronics, ComponentLink5URL=https://datasheet.octopart.com:443/RCA060310K0JNEA-Vishay-datasheet-12535775.pdf?src-supplier=Future+Electronics, ComponentLink6Description=https://datasheet.octopart.com:443/RCA060310K0JNEA-Vishay-datasheet-12509930.pdf?src-supplier=Future+Electronics, ComponentLink6URL=https://datasheet.octopart.com:443/RCA060310K0JNEA-Vishay-datasheet-12509930.pdf?src-supplier=Future+Electronics, ComponentLink7Description=https://datasheet.octopart.com:443/RCA060310K0JNEA-Vishay-datasheet-5392162.pdf?src-supplier=Future+Electronics, ComponentLink7URL=https://datasheet.octopart.com:443/RCA060310K0JNEA-Vishay-datasheet-5392162.pdf?src-supplier=Future+Electronics, ComponentLink8Description=http://sigma.octopart.com:80/rohs_statement/Vishay-company-15.pdf?src-supplier=Compliance+Statements, ComponentLink8URL=http://sigma.octopart.com:80/rohs_statement/Vishay-company-15.pdf?src-supplier=Compliance+Statements, Composition="Thick Film", Contact Plating=Tin, Features="Anti-Sulfur, Automotive AEC-Q200", Height=450µm, Length=1.5494mm, Lifecycle Status=Production, MF=Yageo, Mounting Technology="Surface Mount", MP=RC0603JR0710KL, Number of Terminals=2, Number of Terminations=2, Power Dissipation=100mW, Pricing="1=0.018, 10=0.005, 25=0.005, 100=0.004, 250=0.004, 500=0.004, 1000=0.004 (USD)", Radiation Hardening=No, REACH SVHC=Yes, RoHS=Compliant, Schedule B="8533210045, 8533210045|8533210045|8533210045|8533210045|8533210045", SnapEDA_Link=https://www.snapeda.com/parts/RC0603JR0710KL/Yageo/view-part/?ref=snap, Stock=2572, Supplier="Arrow Electronics", Supplier Part Number=RCA060310K0JNEA, Width=850µm
R406: library part RC0603JR0710KL, "Resistor Chip Thick Film 100k Ohm 1% 1/10W ±100ppm/°K Molded T/R", Case/Package=0603, Manufacturer=Vishay, Manufacturer Part Number=CRCW0603100KFKED, Max Operating Temperature=155°C, Min Operating Temperature=-55°C, Package="0603 Yageo", Power Dissipation=100mW, Supplier Part Number=71-CRCW0603100KFKED, Temperature Coefficient=100ppm/°C, Tolerance=1%, Working Voltage=75V, Category="Chip SMD Resistors", Check_prices=https://www.snapeda.com/parts/RC0603JR0710KL/Yageo/view-part/?ref=eda, China RoHS=Non-Compliant, ComponentLink1Description=https://datasheet.octopart.com:443/CRCW0603100KFKED-Vishay-datasheet-175423584.pdf?src-supplier=IHS, ComponentLink1URL=https://datasheet.octopart.com:443/CRCW0603100KFKED-Vishay-datasheet-175423584.pdf?src-supplier=IHS, ComponentLink2Description=http://sigma.octopart.com:80/rohs_statement/Vishay-company-15.pdf?src-supplier=Compliance+Statements, ComponentLink2URL=http://sigma.octopart.com:80/rohs_statement/Vishay-company-15.pdf?src-supplier=Compliance+Statements, Height=450µm, Lead Free="Lead Free", Lifecycle Status=Production, MF=Yageo, Mounting Technology="Surface Mount", MP=RC0603JR0710KL, Number of Terminals=2, Power Rating=100mW, Pricing="1=0.12, 10=0.033, 50=0.033, 100=0.016, 1000=0.010, 10000=0.005 (USD)", REACH SVHC=Yes, RoHS=Compliant, SnapEDA_Link=https://www.snapeda.com/parts/RC0603JR0710KL/Yageo/view-part/?ref=snap, Stock=39690, Supplier=Mouser, Width=850µm
U300 U301 U302: "Motor / Motion / Ignition Controllers & Drivers 12-V, 2-A Low voltage H-bridge motor driver", Manufacturer_Name="Texas Instruments", Mouser Part Number=595-DRV8212DRLR, Datasheet Link=https://www.ti.com/lit/ds/symlink/drv8212.pdf?ts=1631761675954&ref_url=https%253A%252F%252Fwww.ti.com%252Fstore%252Fti%252Fen%252Fp%252Fproduct%252F%253Fp%253DDRV8212DRLR%2526keyMatch%253DDRV8212DRLR%2526tisearch%253Dsearch-everything%2526usecase%253DOPN, Geometry.Height=0.6mm, Manufacturer_Part_Number=DRV8212DRLR, Mouser Price/Stock=https://www.mouser.co.uk/ProductDetail/Texas-Instruments/DRV8212DRLR?qs=7D1LtPJG0i3wtDTC%2FUQdKg%3D%3D
U400: "EAR99 MCP73871 Matte Tin (Sn) Tube battery charger 5.35V 1.1A 0.5mm -40C~85C TA", Case/Package=QFN, Manufacturer=Microchip, Output Voltage=4.1V, Supplier Part Number=MCP73871-1CAI/ML-ND, Category="Battery Management", ComponentLink1Description=https://datasheet.octopart.com/MCP73871-1CAI/ML-Microchip-datasheet-11053087.pdf, ComponentLink1URL=https://datasheet.octopart.com/MCP73871-1CAI/ML-Microchip-datasheet-11053087.pdf, ComponentLink2Description=https://datasheet.octopart.com:443/MCP73871-1CAI-ML-Microchip-datasheet-175858736.pdf?src-supplier=Microchip, ComponentLink2URL=https://datasheet.octopart.com:443/MCP73871-1CAI-ML-Microchip-datasheet-175858736.pdf?src-supplier=Microchip, ComponentLink3Description=https://datasheet.octopart.com:443/MCP73871-1CAI-ML-Microchip-datasheet-137252038.pdf?src-supplier=Electro+Sonic, ComponentLink3URL=https://datasheet.octopart.com:443/MCP73871-1CAI-ML-Microchip-datasheet-137252038.pdf?src-supplier=Electro+Sonic, ComponentLink4Description=https://datasheet.octopart.com:443/MCP73871-1CAI-ML-Microchip-datasheet-159005942.pdf?src-supplier=SHENGYU+ELECTRONICS, ComponentLink4URL=https://datasheet.octopart.com:443/MCP73871-1CAI-ML-Microchip-datasheet-159005942.pdf?src-supplier=SHENGYU+ELECTRONICS, ComponentLink5Description=https://datasheet.octopart.com:443/MCP73871-1CAI-ML-Microchip-datasheet-142675560.pdf?src-supplier=TME, ComponentLink5URL=https://datasheet.octopart.com:443/MCP73871-1CAI-ML-Microchip-datasheet-142675560.pdf?src-supplier=TME, ComponentLink6Description=https://datasheet.octopart.com:443/MCP73871-1CAI-ML-Microchip-datasheet-24910595.pdf?src-supplier=TME, ComponentLink6URL=https://datasheet.octopart.com:443/MCP73871-1CAI-ML-Microchip-datasheet-24910595.pdf?src-supplier=TME, ComponentLink7Description=http://sigma.octopart.com:80/188450168/materials_sheet/Microchip-MCP73871-1CAI-ML.pdf?src-supplier=Compliance+Statements, ComponentLink7URL=http://sigma.octopart.com:80/188450168/materials_sheet/Microchip-MCP73871-1CAI-ML.pdf?src-supplier=Compliance+Statements, ComponentLink8Description=http://sigma.octopart.com:80/conflict_mineral_statement/Microchip-company-68.pdf?src-supplier=Compliance+Statements, ComponentLink8URL=http://sigma.octopart.com:80/conflict_mineral_statement/Microchip-company-68.pdf?src-supplier=Compliance+Statements, ComponentLink9Description=http://sigma.octopart.com:80/conflict_mineral_statement/Microchip-company-69.pdf?src-supplier=Compliance+Statements, ComponentLink9URL=http://sigma.octopart.com:80/conflict_mineral_statement/Microchip-company-69.pdf?src-supplier=Compliance+Statements, ComponentLink10Description=http://sigma.octopart.com:80/reach_statement/Microchip-company-70.pdf?src-supplier=Compliance+Statements, ComponentLink10URL=http://sigma.octopart.com:80/reach_statement/Microchip-company-70.pdf?src-supplier=Compliance+Statements, ComponentLink11Description=http://sigma.octopart.com:80/rohs_statement/Microchip-company-71.pdf?src-supplier=Compliance+Statements, ComponentLink11URL=http://sigma.octopart.com:80/rohs_statement/Microchip-company-71.pdf?src-supplier=Compliance+Statements, Country of Assembly="Malaysia, Thailand", Country of Fabrication="United States of America", Country of Origin="Malaysia, Thailand", DatasheetVersion="revB, May-2009", Export Control Classification Number (ECCN) Code=EAR99, Harmonized Tariff Schedule (HTS) Code=8542.39.0060, Introduction Date=2008-07-17, Lifecycle Status=Production, Manufacturer Part Number=MCP73871-1CAI/ML, PackageDescription="20-Lead Plastic Quad Flat, No Lead Package (ML) - 4x4x0.9 mm Body [QFN]", PackageReference=QFN-ML20, PackageVersion="revBB, Aug-2009", Pins=20, Pricing="1=2.08, 25=1.736 (EUR)", Projected EOL Date=2034-07-17, RoHS=Non-Compliant, Stock=47, Supplier=DigiKey
U401: "IC REG BCK BST ADJ 3.6A 15VQFN", Case/Package=VQFN, Manufacturer="Texas Instruments", Manufacturer Lifecycle Status=ACTIVE, Max Input Voltage=16V, Max Junction Temperature (Tj)=125°C, Max Output Voltage=9V, Min Input Voltage=2V, Min Operating Temperature=-40°C, Min Output Voltage=2.5V, Output Current=2A, Quiescent Current=50uA, Switching Frequency=2.4MHz, Category="Voltage Regulators - Switching", ComponentLink1Description=https://octopart.com:443/opatz8j6/c1?t=dhCZltYoo_UkPhesAZpvIZTz42jcjPYjzQrmXWuK15fI5KXqnKRrCL9KEBmr3IM6HD6YioQCFSPZfMXUDn0Vme1fr8oLJBsEBqmfs6yA0YjUz45d92W7eQYxzyF0vQVmkJOzV0l4D_EdjPxUZjJu4yz2Xnc4SBK04Rs7bqL42RcAKvJ0PJ9O_C_MfxyWmIK4NBcIiDYVjqBirsiLe-Hdw51UiXTXIN-O1wh9-QM-wbFH3PtY_kSaA31dqItJyAV3A_ATfrsLiODg4tBU0CxYGHeOm2X6r0KwYAL2nGtRZ9XlUYfaFH4zewqVjxAOzj2dIQPGWdHUhWeodas115gv1OIeLKNtKl-2xOwkJz88MQ1Vr-SJnmZIWTmdn1jarGObcJfwIAJ_&src-supplier=Texas+Instruments, ComponentLink1URL=https://octopart.com:443/opatz8j6/c1?t=dhCZltYoo_UkPhesAZpvIZTz42jcjPYjzQrmXWuK15fI5KXqnKRrCL9KEBmr3IM6HD6YioQCFSPZfMXUDn0Vme1fr8oLJBsEBqmfs6yA0YjUz45d92W7eQYxzyF0vQVmkJOzV0l4D_EdjPxUZjJu4yz2Xnc4SBK04Rs7bqL42RcAKvJ0PJ9O_C_MfxyWmIK4NBcIiDYVjqBirsiLe-Hdw51UiXTXIN-O1wh9-QM-wbFH3PtY_kSaA31dqItJyAV3A_ATfrsLiODg4tBU0CxYGHeOm2X6r0KwYAL2nGtRZ9XlUYfaFH4zewqVjxAOzj2dIQPGWdHUhWeodas115gv1OIeLKNtKl-2xOwkJz88MQ1Vr-SJnmZIWTmdn1jarGObcJfwIAJ_&src-supplier=Texas+Instruments, ComponentLink2Description=https://datasheet.octopart.com:443/TPS63070RNMR-Texas-Instruments-datasheet-99731598.pdf?src-supplier=Newark, ComponentLink2URL=https://datasheet.octopart.com:443/TPS63070RNMR-Texas-Instruments-datasheet-99731598.pdf?src-supplier=Newark, ComponentLink3Description=https://datasheet.octopart.com:443/TPS63070RNMR-Texas-Instruments-datasheet-159118225.pdf?src-supplier=LCSC, ComponentLink3URL=https://datasheet.octopart.com:443/TPS63070RNMR-Texas-Instruments-datasheet-159118225.pdf?src-supplier=LCSC, ComponentLink4Description=https://datasheet.octopart.com:443/TPS63070RNMR-Texas-Instruments-datasheet-140571939.pdf?src-supplier=Arrow.cn, ComponentLink4URL=https://datasheet.octopart.com:443/TPS63070RNMR-Texas-Instruments-datasheet-140571939.pdf?src-supplier=Arrow.cn, ComponentLink5Description=http://sigma.octopart.com:80/conflict_mineral_statement/Texas-Instruments-company-63.pdf?src-supplier=Compliance+Statements, ComponentLink5URL=http://sigma.octopart.com:80/conflict_mineral_statement/Texas-Instruments-company-63.pdf?src-supplier=Compliance+Statements, ComponentLink6Description=http://sigma.octopart.com:80/reach_statement/Texas-Instruments-company-64.pdf?src-supplier=Compliance+Statements, ComponentLink6URL=http://sigma.octopart.com:80/reach_statement/Texas-Instruments-company-64.pdf?src-supplier=Compliance+Statements, Height=1mm, Lead Free="Lead Free", Length=3mm, Lifecycle Status=Production, Manufacturer Part Number=TPS63070RNMR, Max Duty Cycle=100%, Max Operating Temperature=125°C, Max Supply Voltage=16V, Min Supply Voltage=2V, Mount="Surface Mount", Mounting Technology="Surface Mount", Number of Outputs=1, Number of Pins=15, Output Configuration=Positive, Output Type=Adjustable, Output Voltage=2.5V, Packaging="Tape and Reel", Pins=15, Pricing="1=2.422, 10=1.968, 25=1.817, 100=1.658, 250=1.574, 500=1.518, 1000=1.403 (USD)", RoHS=Compliant, RoHS Compliant=Yes, Schedule B="8542390000, 8542390000|8542390000|8542390000|8542390000|8542390000", Stock=1476, Supplier="Arrow Electronics", Supplier Part Number=TPS63070RNMR, Synchronous Rectifier=Yes, Thickness=900µm, Topology=Buck-Boost, Width=2.5mm
U402: "Linear Voltage Regulator IC Positive Fixed 1 Output 500mA SOT-23-5", Manufacturer_Name="Texas Instruments", Datasheet Link=https://www.ti.com/lit/ds/symlink/tlv785.pdf?ts=1763721349650&ref_url=https%253A%252F%252Fwww.ti.com%252Fproduct%252FTLV785%252Fpart-details%252FTLV78533PDBVR, Geometry.Height=1.45mm, Manufacturer_Part_Number=TLV78533PDBVR

## Via types
v1: diameter 19.68, hole 7.87, Top Layer to Bottom Layer, 4 vias

## Nets (pads, with @x,y where several pads share a name; then routed paths per layer and width w, separated by ;. In a path a pad name is that pad's centre, name@x,y a point inside that pad or via, vN(x,y) a via of type N, cw(c..) or ccw(c..) an arc to the next point about the centre after c; other vN are vias at no path point)
5V0: C404.2 C405.2 C406.2 C413.2 C414.2 R400.2 R406.1 U401.7-8 U402.1 U402.3
AIN0_M1: B200.E8 C303.2 R301.1
AIN0_M2: B200.G3 C307.2 R303.1
AIN0_M3: B200.H3 C311.2 R305.1
AIN1_M1: B200.E7 C304.2 R300.2
AIN1_M2: B200.G2 C308.2 R302.2
AIN1_M3: B200.J8 C312.2 R304.2
BMS_PG: B200.J7 U400.6
BMS_STAT1: B200.H1 U400.8
BMS_STAT2: B200.J9 U400.7
BTN_DPI: B200.D3
BTN_LPB1: B200.D7
BTN_LPB2: B200.D8
BTN_MODE: B200.C6
BTN_POWER: B200.C5
BTN_SCROLL: B200.C4
ENCODER_A: B200.H7
ENCODER_B: B200.H8
I2C1_SCL: B200.A3
I2C1_SDA: B200.B4
I2C2_SCL: B200.G9
I2C2_SDA: B200.H9
MCU_GND: B200.A1 B200.A6 B200.A9 B200.B2 B200.B8 B200.E4 B200.E5 B200.F4 B200.F5 B200.J1 B200.J4 B200.J5 B200.K1 B200.K2 B200.K3 B200.K5 B200.K7 B200.K8 B200.L1 B200.L9 B200.M1 B200.M2 B200.M8 B200.M9 C200.1 C201.1 C202.1 C300.1 C301.1 C302.1 C303.1 C304.1 C305.1 C306.1 C307.1 C308.1 C309.1 C310.1 C311.1 C312.1 C400.2 C401.1 C402.1 C403.1 C404.1 C405.1 C406.1 C407.1 C408.1 C409.1 C410.1 C411.1 C412.1 C413.1 C414.1 C415.1 C416.1 C500.1 C501.1 C502.1 D500.2 IC300.4 IC300.9 J302.5 J500.1 J500.2 J500.3 J500.4 J500.A1 J500.A12 J500.B1 J500.B12 J?.1 R401.1 R402.1 R403.1 R404.1 R500.1 R501.1 U300.3 U301.3 U302.3 U400.9 U400.10 U400.11 U400.21 U401.4 U401.6 U401.10 U401.15 U402.2 U402.4
MCU_VBUS: B200.B9 C200.2 C401.2 C402.2 C403.2 C500.2 C501.2 C502.2 D500.5 J500.A4 J500.A9 J500.B4 J500.B9 U400.2 U400.3 U400.4 U400.17 U400.18 U400.19
  other v1: 973.35,598.35 1016.65,598.35 973.35,641.65 1016.65,641.65
MCU_VDD: B200.A7 B200.A8 B200.B7 C201.2 C202.2 C300.2 C301.2 C302.2 C305.2 C306.2 C309.2 C310.2 C415.2 C416.2 IC300.8 J302.1 R200.1 U300.5 U301.5 U302.5 U402.5
NetC400_1: C400.1 U401.3
NetC407_2: C407.2 C408.2 C409.2 C410.2 C411.2 R405.2 U400.1 U400.20 U401.12-13
NetJ500_A5: J500.A5 R500.2
NetJ500_B5: J500.B5 R501.2
NetL400_1: L400.1 U401.9
NetL400_2: L400.2 U401.11
NetR400_1: R400.1 R401.2 U401.5
NetR402_2: R402.2 U400.5
NetR403_2: R403.2 U400.12
NetR404_2: R404.2 U400.13
NetR405_1: R405.1 U401.1 U401.14
NetR406_2: R406.2 U401.2
NRST: B200.J3 J302.3 R200.2
OP_MOTION_CS: B200.A2
OP_MOTION_INT: B200.B5
OP_MOTION_MISO: B200.C1
OP_MOTION_MOSI: B200.C2
OP_MOTION_RESET: B200.A4
OP_MOTION_SCK: B200.B1
OUT1_MOTOR1: J300.1 R301.2 U300.6
OUT1_MOTOR2: J301.1 R303.2 U301.6
OUT1_MOTOR3: J303.1 R305.2 U302.6
OUT2_MOTOR1: J300.2 R300.1 U300.4
OUT2_MOTOR2: J301.2 R302.1 U301.4
OUT2_MOTOR3: J303.2 R304.1 U302.4
PWM0_M1: B200.E9 U300.1
PWM0_M2: B200.G4 U301.1
PWM0_M3: B200.F7 U302.1
PWM1_M1: B200.B6 U300.2
PWM1_M2: B200.G8 U301.2
PWM1_M3: B200.F8 U302.2
QSPI_CSN: B200.E1 IC300.1
QSPI_IO0: B200.D2 IC300.5
QSPI_IO1: B200.E2 IC300.2
QSPI_IO2: B200.D1 IC300.3
QSPI_IO3: B200.F2 IC300.7
QSPI_SCK: B200.F1 IC300.6
SWCLK: B200.J2 J302.4
SWDIO: B200.H2 J302.2
SWO: B200.B3 J302.6
USART0_DTR: B200.F3
USART0_RTS: B200.E3
USART0_RX: B200.C8
USART0_TX: B200.A5
USB_D_N: B200.D9 D500.3 D500.4 J500.A7 J500.B7
USB_D_P: B200.C9 D500.1 D500.6 J500.A6 J500.B6
V-BAT: C412.2 J?.2 U400.14 U400.15 U400.16
pads on no net: B200.F9 B200.G1 B200.G5 B200.G7 B200.K9 J302.7 J302.8 J302.9 J302.10 J302.11 J302.12 J302.13 J500. J500.A2 J500.A3 J500.A8 J500.A10 J500.A11 J500.B2 J500.B3 J500.B8 J500.B10 J500.B11

## Silkscreen, mask and mechanical layers (free items; w line width, h text height)
Mechanical 13:
  the board outline again, w10